# Altium PCB pcb schematic.PcbDoc
Units mil, origin at the board's own origin, x right, y up, seen from the top; angles counter-clockwise.
Board outline 6000 x 4000 mil, 4 copper layers (SIG 0, GND 0, GND 1, SIG 1), stack 53.912 mil thick; 8 components, 8 nets, 22 pads, 0 vias.
Unrouted connection lines stored in the file: 12.
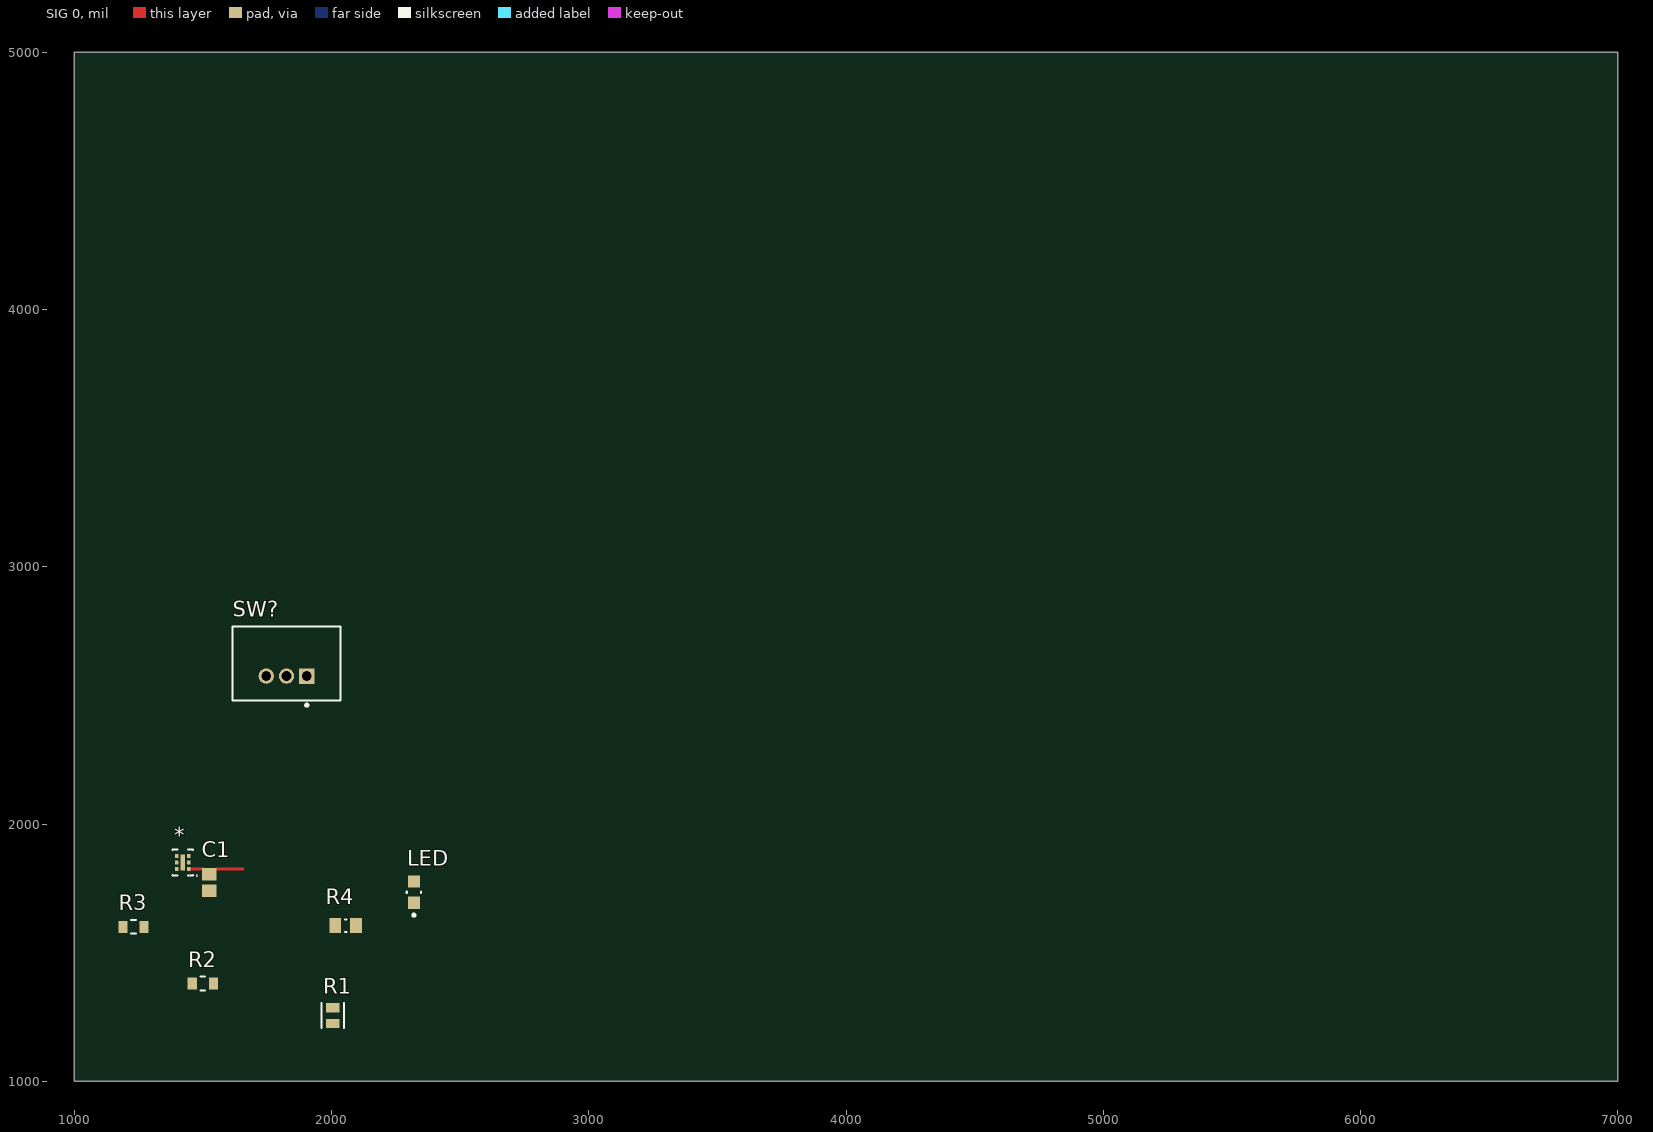
[diagram p0: SIG 0 view]
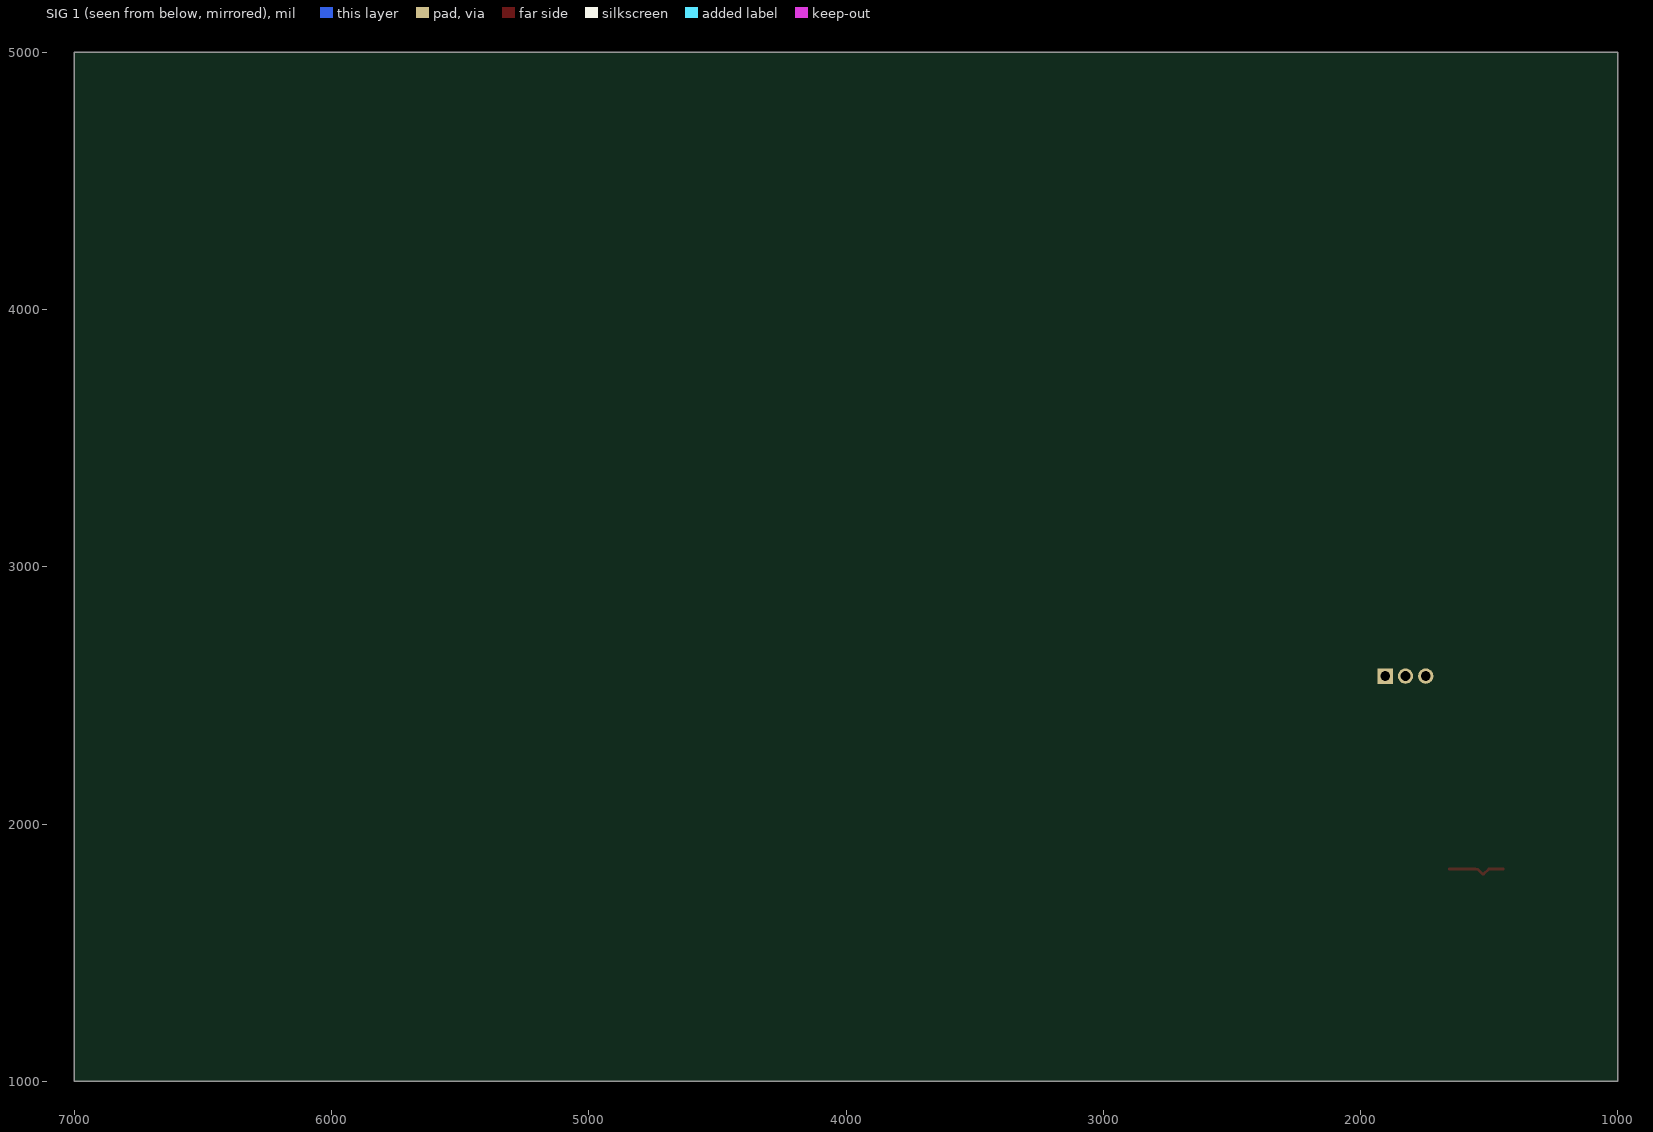
[diagram p1: SIG 1 view, seen from below]
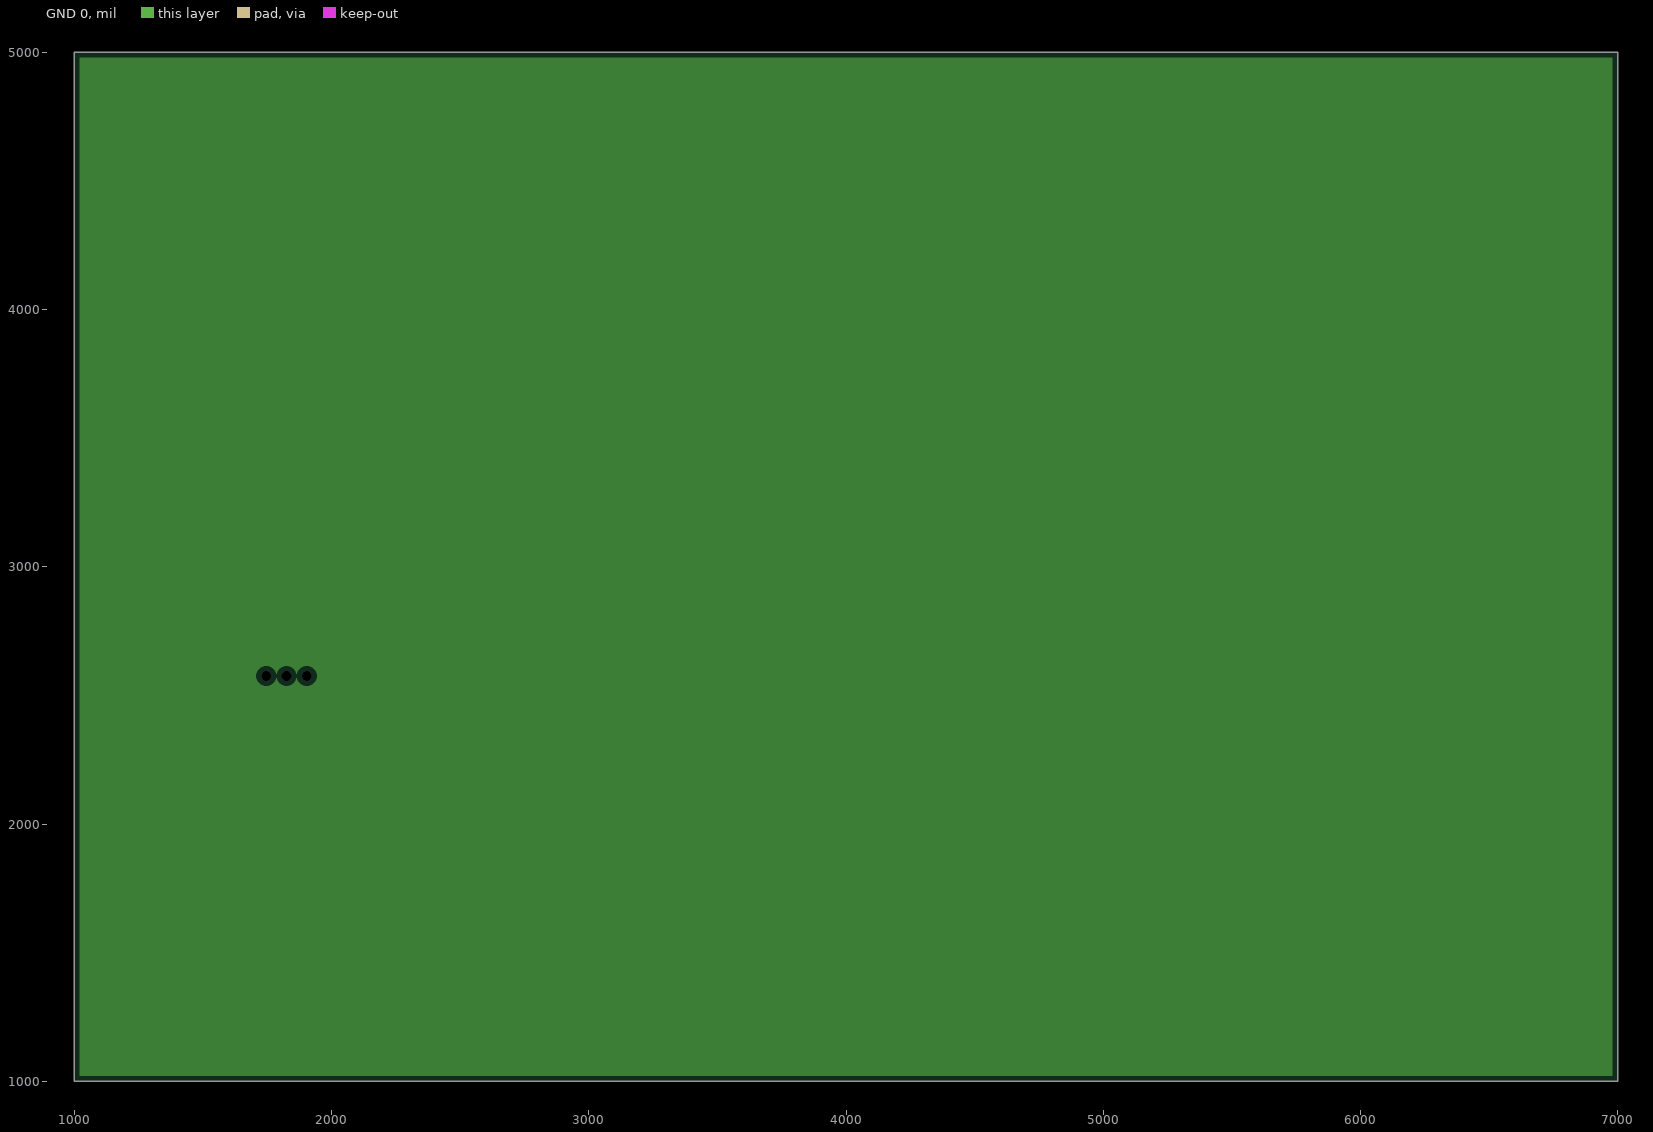
[diagram p2: GND 0, clearances drawn from the general rule]
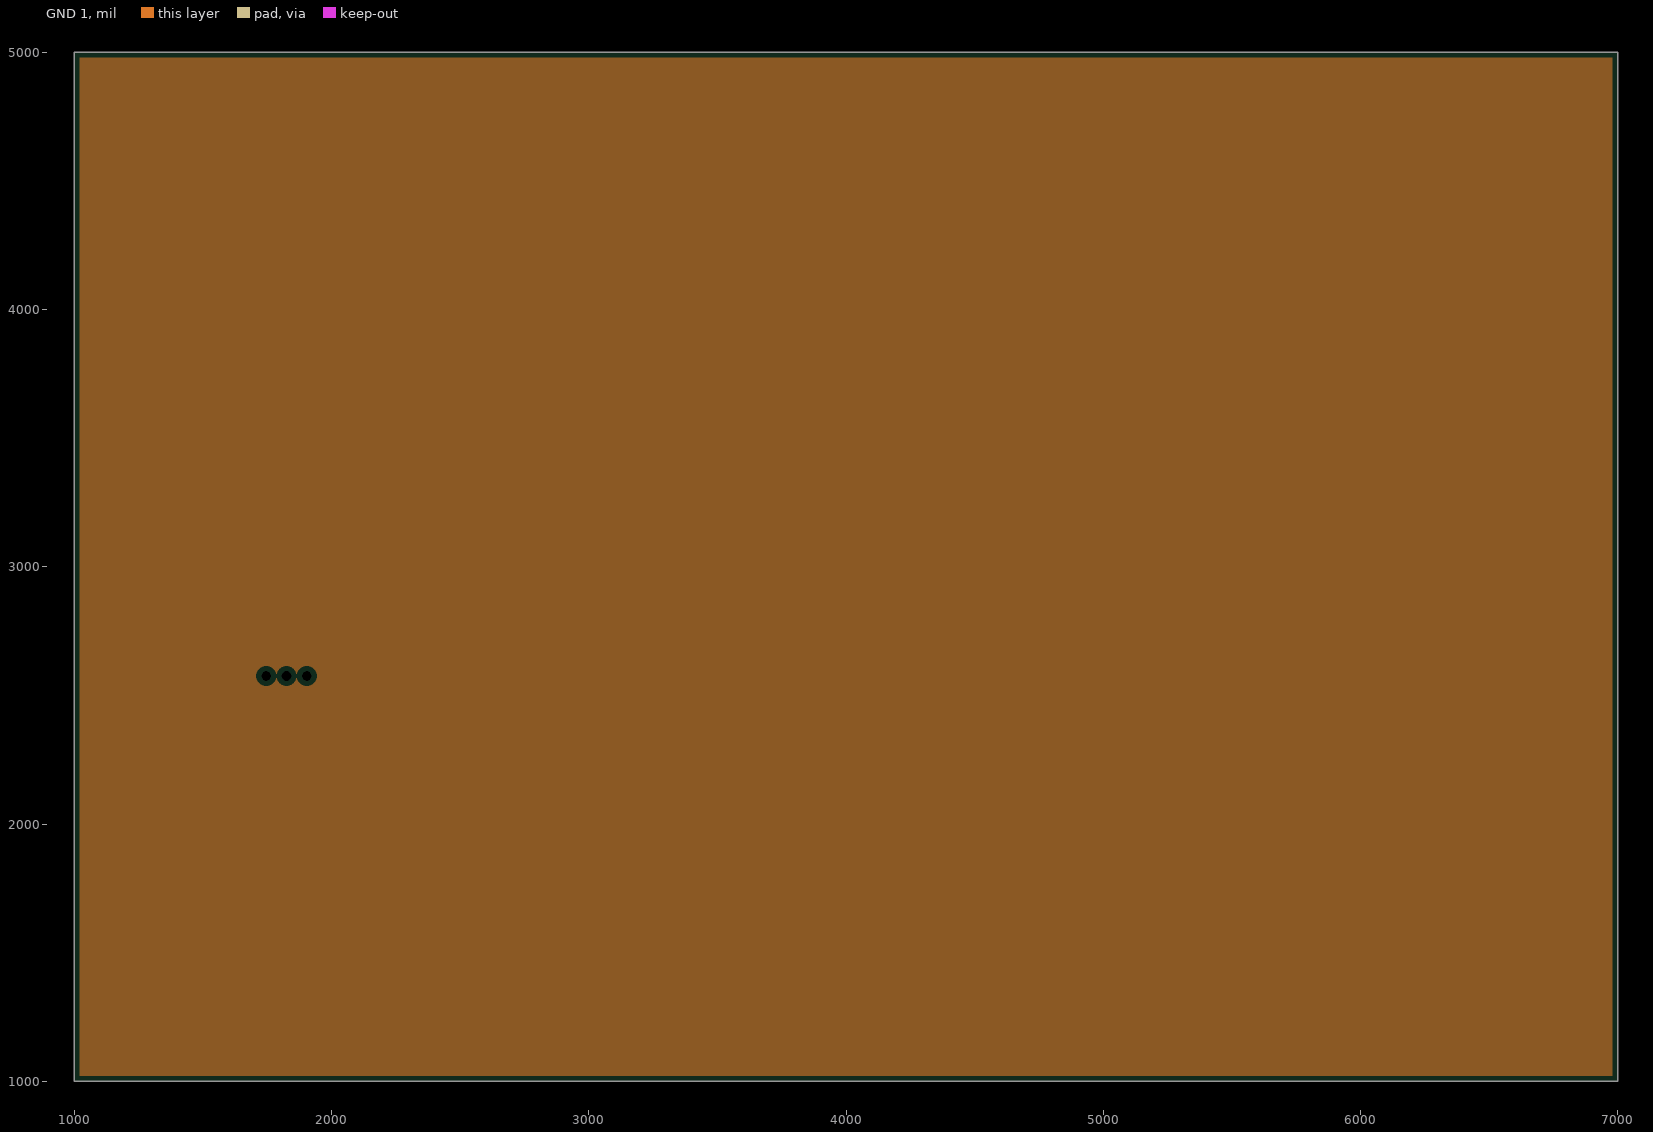
[diagram p3: GND 1, clearances drawn from the general rule]

## Layer stack, top to bottom
Top Solder: solder mask 1, SM-001, Dk 4
SIG 0: signal copper 1.378
Dielectric 1: prepreg 5.1, PP-017, Dk 4.3
Dielectric 2: prepreg 5.1, PP-017, Dk 4.3
GND 0: plane copper 1.378
Dielectric 3: core 28, Core-039, Dk 4.8
GND 1: plane copper 1.378
Dielectric 4: prepreg 5.1, PP-017, Dk 4.3
Dielectric 5: prepreg 5.1, PP-017, Dk 4.3
SIG 1: signal copper 1.378
Bottom Solder: solder mask 1, SM-001, Dk 4

## Board outline
1000,1000 7000,1000 7000,5000 1000,5000

## Design rules (kind name [scope] priority, off if disabled: settings)
Clearance [All] p1: gap=10 ignorepadtopadclearanceinfootprint=FALSE
PlaneClearance [All] p1: clearance=20
PlaneConnect [All] p1: planeconnectstyle=Relief reliefexpansion=20 reliefentries=4 reliefconductorwidth=10 reliefairgap=10
PolygonConnect [All] p1: connectstyle=Relief reliefconductorwidth=10 reliefentries=4 polygonreliefangle="90 Angle" airgapwidth=10
RoutingVias [All] p1: holewidth=28 width=50 viastyle="Through Hole" minholewidth=28 minwidth=50 maxholewidth=28 maxwidth=50
SolderMaskExpansion [All] p1: expansion=4 istentingtop=FALSE
SupplyNets "Schematic Supply Nets_2" [InNet('VOUT')] p1: voltage=0.000
SupplyNets "Schematic Supply Nets" [InNet('GND')] p2: voltage=0.000
Width [All] p1: maxlimit=10 minlimit=10 preferedwidth=10
28 further rules are at their usual default settings.

## Components (designator, comment, footprint, x,y, rotation, side; value= is the part's Value field where it differs from the comment)
* "NCP718" NCP718 1421.77,1850.59 r180 top
C1 "VJ0805Y105KXQRW1BC" CAPC2013X145X50NL20T20 1525,1772.52 r90 top
LED "Q62702P5179" FP-LG_R971-MFG 2320,1735 r90 top
R1 "CRGCQ0805F100K" FP-CRGCQ0805-IPC_C 2005,1255 r90 top value=100KΩ
R2 "AC0805FR-07180KL" FP-AC0805-MFG 1500,1380 r0 top value=180KΩ
R3 "RT0805BRD07499KL" FP-RT0805-MFG 1230,1600 r0 top value=499KΩ
R4 "MCU0805MD1000BP100" FP-MCU0805-IPC_A 2055,1605 r0 top
SW? "1825282-1" FP-1825282-1-MFG 1825,2575 r180 top

## Footprints (in the part's own frame and the unit in brackets; to place one, negate y for a bottom-side part, rotate by r counter-clockwise, add the part's x,y. Pads: shape width x height; smd on the part's side, far side on the other; paste and mask are expansions set on the pad)
CAPC2013X145X50NL20T20 [mm] "Chip Capacitor, 2-Leads, Body 2.00x1.25mm, IPC Medium Density"
  rect 1.25x1.45 smd: 1(-0.825,0) 2(0.825,0)
  body extent -1.1,-0.72 1.1,0.72, height 1.45
FP-1825282-1-MFG [mm]
  rect 1.52x1.52 hole 0.97 paste-2539.97 mask+0: 1(-2,0)
  round 1.52 hole 0.97 paste-2539.97 mask+0: 2(0,0) 3(2,0)
  silkscreen extent -5.35,-4.9 5.35,3, body extent -5.45,-5 5.45,2.5, height 0.25
FP-AC0805-MFG [mm]
  rect 0.9x1.2 smd paste+0 mask+0: 1(-1.05,0) 2(1.05,0)
  silkscreen extent -0.23,-0.67 0.23,0.67, body extent -1.6,-0.77 1.6,0.77, height 0.25
FP-CRGCQ0805-IPC_C [mil]
  rect 35.67x51.57 smd paste+0 mask+0: 1(-30.55,0) 2(30.55,0)
  silkscreen extent -48,-43 48,43, body extent -52,-31 52,31, height 10
FP-LG_R971-MFG [mm]
  rect 1.2x1.2 smd paste+0 mask+0: 1(-1.05,0) 2(1.05,0)
  silkscreen extent -2.4,-0.7 0.08,0.7, body extent -1.75,-0.8 1.75,0.8, height 0.25
FP-MCU0805-IPC_A [mil]
  rect 45.62x59.38 smd paste+0 mask+0: 1(-40.42,0) 2(40.42,0)
  silkscreen extent -3,-25 3,25, body extent -83,-49 83,49, height 10
FP-RT0805-MFG [mm]
  rect 0.9x1.2 smd paste+0 mask+0: 1(-1.05,0) 2(1.05,0)
  silkscreen extent -0.23,-0.67 0.23,0.67, body extent -1.6,-0.77 1.6,0.77, height 0.25
NCP718 [mm] "PSON, 6-Leads, Body 2,30x1,70mm, Pitch 0,65mm, Thermal Pad 1,60x0,43mm, IPC Medium Density"
  rect 0.35x0.4 smd: 1(-0.59,0.65) 2(-0.59,0) 3(-0.59,-0.65) 4(0.59,-0.65) 5(0.59,0) 6(0.59,0.65)
  rect 0.43x1.6 smd: 7(0,0)
  silkscreen extent -1.45,-1.3 1,1.35, body extent -0.85,-1.15 0.85,1.15, height 0.8

## Part data
C1: library part CMP-2007-01676-1, Manufacturer=Vitramon, Part Number=VJ0805Y105KXQRW1BC
LED: library part CMP-62016-000039-1, "LED GREEN DIFFUSED 0805 SMD", Case Code (Imperial)=0805, Case Code (Metric)=2012, Color=Green, Forward Current=25mA, Forward Voltage=2.2V, Lens Color=White, Max Operating Temperature=85°C, Min Operating Temperature=-30°C, Package Quantity=1, Power Dissipation=65mW, Reverse Voltage=12V, Test Current=20mA, Case/Package=0805, Depth=1.35mm, Dominant Wavelength=570nm, Height=0.9mm, Illumination Color=Green, Length=2.1mm, Lens Size=1.25mm, Lens Style=Diffused, Lens Transparency=Diffused, Luminous Flux=0.1lm, Luminous Intensity=45mcd, Mount="Surface Mount", Number of Elements=1, Number of LEDs=1, Number of Pins=2, Packaging="Tape and Reel", Radiation Hardening=No, Viewing Angle=160°, Width=1.25mm
R1: library part CMP-03211-000816-1, "CRGCQ 0805 100K 1%", Ambient Temperature Range High=+70°C, Manufacturer="TE Connectivity", Package=CRGCQ0805, Power Rating=0.125W, Resistance=100KΩ, Temperature="-55°C to +155°C", Temperature Coefficient=±100ppm/°C, Temperature Range High=+155°C, Temperature Range Low=-55°C, Tolerance=0.01, Voltage Rating=150V, Automotive=Yes, Automotive Grade="Grade 1141", Category=Res, ComponentLink2Description=Datasheet, ComponentLink2URL=https://www.te.com/commerce/DocumentDelivery/DDEController?Action=showdoc&DocId=Data+Sheet%7F1773204-3%7F1%7Fpdf%7FEnglish%7FENG_DS_1773204-3_1.pdf%7F4-2176341-1150, Composition="Thick Film", Device Class L1="Passive Components", Device Class L2=Resistors, Device Class L3="Chip SMD Resistors", Digikey Description="CRGCQ 0805 100K 1%", Height=0.65mm, Ipc Land Pattern Name=RESC200125X55, Lead Free=Yes, Manufacturer Part Number=CRGCQ0805F100K, Mouser Description="Res Thick Film 0805 100K Ohm 1% 0.125W(1/8W) ±100ppm/C Pad SMD Automotive T/R", Octopart=https://octopart.com/crgcq0805f100k-te+connectivity-91018138, RoHS=TRUE, Series=CRGCQ
R2: library part CMP-03412-037640-1, "RES SMD 180K OHM 1% 1/8W 0805", Manufacturer=Yageo, Package=AC0805, Power Rating=1/8W, Resistance=180KΩ, Temperature="-55°C to +155°C", Temperature Range High=+155°C, Temperature Range Low=-55°C, Tolerance=0.01, Voltage Rating=150V, Automotive=Yes, Automotive Grade="Grade 0", Category=Res, ComponentLink2Description=Datasheet, ComponentLink2URL=http://www.yageo.com/documents/recent/PYu-AC_51_RoHS_L_6.pdf, Composition="Thick Film", Device Class L1="Passive Components", Device Class L2=Resistors, Device Class L3="Chip SMD Resistors", Digikey Description="RES SMD 180K OHM 1% 1/8W 0805", Footprint Url=http://www.yageo.com/exep/pages/download/literatures/PYu-R_Mount_10.pdf, Height=0.6mm, Ipc Land Pattern Name=RESC200125X50, Lead Free=Yes, Manufacturer Part Number=AC0805FR-07180KL, Octopart=https://octopart.com/ac0805fr-07180kl-yageo-26041139, RoHS=TRUE, Series=AC
R3: library part CMP-2001-01744-2, "RES SMD 499K OHM 0.1% 1/8W 0805", Manufacturer=Yageo, Package=RT0805, Power Rating=0.125W, Resistance=499KΩ, Temperature="-55°C to +155°C", Temperature Coefficient="25 ppm/°C", Temperature Range High=+155°C, Temperature Range Low=-55°C, Tolerance=0.0025, Voltage Rating=150V, Automotive=No, Category=Res, ComponentLink2Description=Datasheet, ComponentLink2URL=http://www.yageo.com/documents/recent/PYu-RT_1-to-0.01_RoHS_L_9.pdf, Composition="Thin Film", Device Class L1="Passive Components", Device Class L2=Resistors, Device Class L3="Chip SMD Resistors", Digikey Description="RES SMD 499K OHM 0.1% 1/8W 0805", Footprint Url=http://www.yageo.com/exep/pages/download/literatures/PYu-R_Mount_10.pdf, Height=0.6mm, Ipc Land Pattern Name=RESC200125X50, Lead Free=Yes, Manufacturer Part Number=RT0805BRD07499KL, Mouser Description="Thin Film Resistors - SMD 1/8W 499K ohm .1% 25ppm", Octopart=https://octopart.com/rt0805brd07499kl-yageo-1259857, RoHS=TRUE, Series=RT
R4: library part CMP-02407-001292-1, "RES 1.05K OHM 0.5% 1/5W 0805", Case Code (Imperial)=0805, Case Code (Metric)=2012, Max Operating Temperature=155°C, Max Power Dissipation=200mW, Min Operating Temperature=-55°C, Package Quantity=1, Resistance=100R, Temperature Coefficient=25ppm/°C, Tolerance=0.1%, Voltage Rating=150V, Case/Package=0805, Composition="Thin Film", Features="Automotive AEC-Q200", Height=0.024inch, Length=0.079inch, Number of Terminations=2, Packaging="Tape and Reel", Power Rating=200mW, Weight=0.000162oz, Width=0.049inch
SW?: library part CMP-03405-000011-1, "SWITCH SLIDE SPDT 100MA 12V", Contact Current Rating=100mA, Flammability Rating="UL94 V-0", Max Operating Temperature=70°C, Max Voltage Rating (DC)=12V, Min Operating Temperature=-20°C, Operating Force=250gf, Package Quantity=800, Actuator Length=2.5mm, Actuator Material=Nylon, Actuator Type=Standard, Contact Material="Copper Alloy", Contact Plating=Silver, Contact Style=Shorting, Current Rating=100mA, Depth=6.8mm, Electrical Life=10000Cycles, ELV=Compliant, Housing Material=Nylon, Length=10.2mm, Max Current Rating=100mA, Mechanical Life=10000Cycles, Mount="Through Hole", Number of Positions=2, Packaging=Tray, Radiation Hardening=No, RoHS Compliant=Yes, Series="SSJ, Alcoswitch", Switch Function=On-On, Switch Travel=2mm, Tail Length=0.118inch, Termination="PC Pins", Throw Configuration=SPDT, Type=Switch, Voltage Rating (DC)=12V, Width=4.3mm

## Nets (pads, with @x,y where several pads share a name; then routed paths per layer and width w, separated by ;. In a path a pad name is that pad's centre, name@x,y a point inside that pad or via, vN(x,y) a via of type N, cw(c..) or ccw(c..) an arc to the next point about the centre after c; other vN are vias at no path point)
GND: *.3 *.5 C1.1 LED.1 R1.1
Net*_2: *.2 R1.2 SW?.2
Net*_4: *.4
Net*_6: *.6 R4.1
NetLED_2: LED.2 R4.2
NetR2_2: R2.2 SW?.3
NetR3_2: R3.2 SW?.1
VOUT: *.1 C1.2 R2.1 R3.1 | length 226.3
  SIG 0 w10: *.1 1501.06,1825 1521.06,1805 C1.2 1544.61,1824.61 1554.01,1824.61 1554.4,1825 1654.7,1825
pads on no net: *.7

## Polygon pours and split planes (outlines as drawn)
no net on GND 0 (split plane): 6979.9,1020.1 1020.1,1020.1 1020.1,4979.9 6979.9,4979.9
no net on GND 1 (split plane): 6979.9,1020.1 1020.1,1020.1 1020.1,4979.9 6979.9,4979.9